# Altium PCB ZYNQ-HS-DEV-PCB.PcbDoc (part 10 of 13)
Units mm, origin at the board's own origin, x right, y up, seen from the top; angles counter-clockwise.
Board outline 125.73 x 111.93 mm, 10 copper layers (S1 (SIG), S2 (GND), S3 (SIG), S4 (GND), S5 (PWR), S6 (SIG), S7 (GND), S8 (SIG), S9 (GND), S10 (SIG)), stack 1.597 mm thick; 545 components, 400 nets, 2449 pads, 1577 vias.
Unrouted connection lines stored in the file: 309.
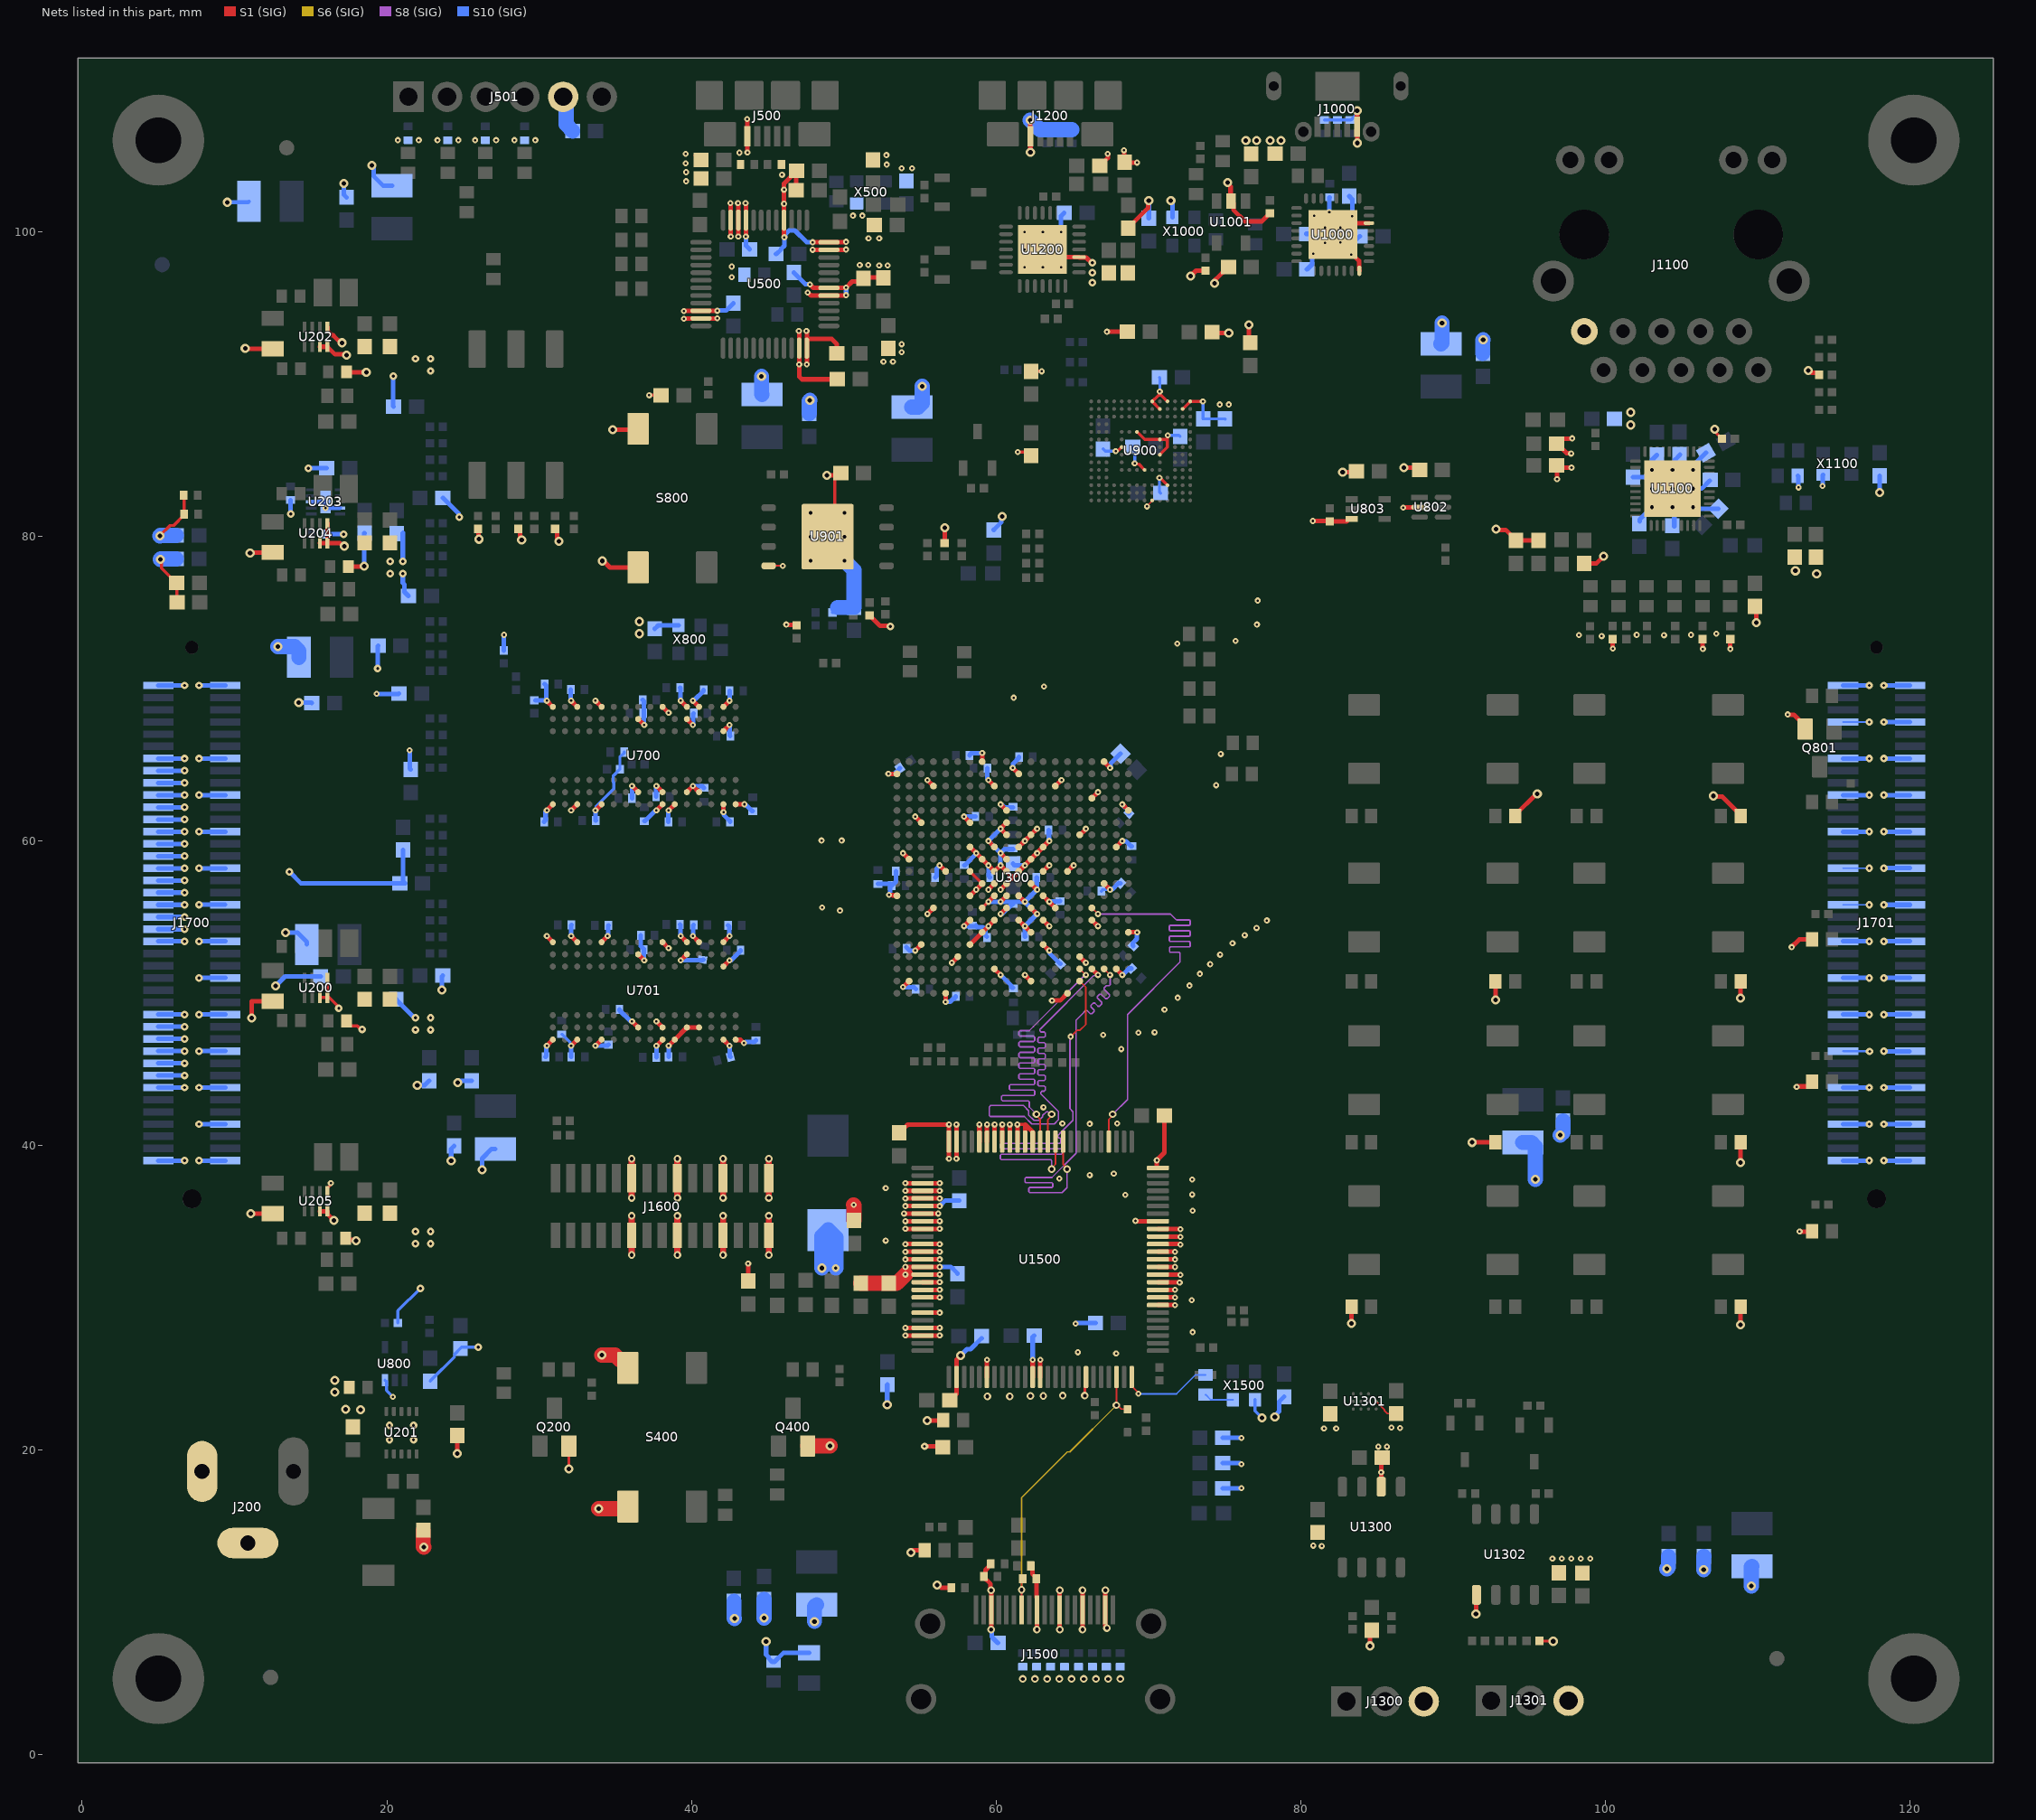
[diagram p17: the nets of this part, all layers, seen from the top]

## Via types
v1: diameter 0.4, hole 0.15, S1 (SIG) to S10 (SIG), tented both sides, 892 vias
v2: diameter 0.5, hole 0.2, S1 (SIG) to S10 (SIG), tented both sides, 231 vias
v3: diameter 0.6, hole 0.3, S1 (SIG) to S10 (SIG), tented both sides, 188 vias
v4: diameter 1, hole 0.5, S1 (SIG) to S10 (SIG), tented both sides, 158 vias
v5: diameter 0.5, hole 0.25, S1 (SIG) to S10 (SIG), tented both sides, 108 vias

## Nets (pads, with @x,y where several pads share a name; then routed paths per layer and width w, separated by ;. In a path a pad name is that pad's centre, name@x,y a point inside that pad or via, vN(x,y) a via of type N, cw(c..) or ccw(c..) an arc to the next point about the centre after c; other vN are vias at no path point) (continued)
GND: C201.1 C202.1 C203.1 C204.1 C205.1 C206.1 C208.1 C209.1 C210.1 C211.1 C212.1 C213.1 C214.1 C216.1 C217.1 C218.1 C220.1 C221.1 C222.1 C300.1 C301.1 C302.1 C303.2 C304.1 C305.1 C306.1 C307.1 C308.1 C309.1 C310.1 C311.1 C312.2 C313.1 C314.1 C315.2 C316.1 C317.1 C318.1 C319.1 C320.1 C321.1 C322.1 C323.2 C324.1 C325.1 C326.1 C327.1 C328.1 C329.1 C330.1 C331.2 C332.1 C333.1 C334.1 C335.1 C336.1 C337.1 C338.1 C339.1 C340.1 C341.1 C342.1 C343.1 C344.1 C345.1 C346.2 C347.1 C348.1 C349.2 C350.1 C351.1 C352.1 C353.1 C354.1 C355.1 C356.1 C357.1 C500.1 C501.1 C502.1 C503.1 C504.1 C505.1 C506.1 C507.1 C508.1 C509.1 C510.1 C511.1 C512.1 C513.1 C514.1 C515.1 C516.1 C600.1 C601.1 C602.1 C603.1 C604.1 C605.1 C606.1 C607.1 C608.1 C609.1 C610.1 C611.1 C612.1 C701.1 C702.1 C703.1 C704.1 C705.1 C707.1 C708.1 C709.1 C710.1 C711.1 C712.1 C713.1 C714.1 C715.1 C716.1 C717.1 C718.1 C719.1 C720.1 C721.1 C722.1 C723.1 C725.1 C726.1 C727.1 C728.1 C729.1 C731.1 C732.1 C733.1 C734.1 C735.1 C736.1 C737.1 C738.1 C739.1 C740.1 C741.1 C742.1 C743.1 C744.1 C745.1 C800.1 C801.1 C802.1 C803.2 C804.1 C805.1 C806.1 C900.1 C901.1 C902.1 C903.1 C904.1 C905.1 C906.1 C907.1 C908.1 C909.1 C910.1 C911.1 C912.1 C1000.1 C1001.1 C1002.1 C1003.1 C1004.1 C1005.1 C1006.1 C1007.1 C1008.1 C1100.1 C1101.1 C1102.1 C1103.1 C1104.1 C1105.1 C1106.1 C1107.1 C1108.1 C1109.1 C1110.1 C1111.1 C1112.1 C1113.1 C1114.1 C1115.1 C1116.1 C1117.1 C1200.1 C1201.1 C1202.1 C1203.1 C1204.1 C1205.1 C1300.1 C1301.1 C1302.1 C1303.1 C1304.1 C1305.1 C1306.1 C1500.1 C1501.1 C1502.1 C1503.1 C1504.1 C1505.1 C1506.1 C1507.1 C1508.1 C1509.1 C1510.1 C1511.1 C1512.1 C1513.1 C1514.1 C1515.1 C1516.1 C1517.1 C1520.1 D500.1 D501.1 D502.1 D503.1 D504.1 D505.1 D1000.1 D1001.1 D1002.1 D1200.1 D1201.1 D1202.1 D1400.2 D1401.2 D1402.2 D1501.1 D1502.1 D1503.1 D1504.1 D1505.1 D1506.1 D1507.1 D1508.1 D1509.1 D1510.1 D1511.1 D1512.1 D1513.1 J200.2 J200.3 J500.5 J501.5 J1000.5 J1100.10 J1200.5 J1300.3 J1301.3 J1500.2 J1500.5 J1500.8 J1500.11 J1500.17 J1600.1 J1600.1_1 J1600.4 J1600.4_1 J1600.7 J1600.7_1 J1600.10 J1600.10_1 J1700.1 J1700.2 J1700.13 J1700.14 J1700.15 J1700.17 J1700.19 J1700.20 J1700.21 J1700.23 J1700.25 J1700.26 J1700.27 J1700.29 J1700.31 J1700.32 J1700.33 J1700.35 J1700.37 J1700.38 J1700.39 J1700.41 J1700.43 J1700.44 J1700.50 J1700.55 J1700.56 J1700.57 J1700.59 J1700.61 J1700.62 J1700.63 J1700.65 J1700.67 J1700.68 J1700.74 J1700.79 J1700.80 J1701.1 J1701.2 J1701.7 J1701.8 J1701.13 J1701.14 J1701.19 J1701.20 J1701.25 J1701.26 J1701.31 J1701.32 J1701.37 J1701.38 J1701.43 J1701.44 J1701.49 J1701.50 J1701.55 J1701.56 J1701.61 J1701.62 J1701.67 J1701.68 J1701.73 J1701.74 J1701.79 J1701.80 Q200.2 Q400.2 Q801.2 R204.1 R205.1 R209.1 R215.1 R218.1 R300.2 R508.2 R626.1 R627.1 R700.1 R701.1 R802.1 R804.2 R807.1 R810.1 R823.2 R824.2 R916.1 R917.1 R918.1 R919.1 R920.1 R1005.1 R1006.1 R1110.1 R1111.1 R1112.1 R1117.2 R1120.1 R1123.1 R1308.1 R1405.2 R1406.2 R1412.2 R1413.2 R1414.2 R1415.2 R1505.1 R1509.1 S400.1 S400.2 S800.1 S800.2 U200.3 U200.4 U200.5 U201.11 U202.3 U202.4 U202.5 U203.4 U203.8 U203.11 U204.3 U204.4 U204.5 U205.3 U205.4 U205.5 U300.A8 U300.A18 U300.B1 U300.B11 U300.C4 U300.C9 U300.C14 U300.D17 U300.E10 U300.E20 U300.F3 U300.F7 U300.F10 U300.G10 U300.G12 U300.G16 U300.H7 U300.H9 U300.H11 U300.H13 U300.H19 U300.J2 U300.J8 U300.J10 U300.J12 U300.K5 U300.K7 U300.K9 U300.K10 U300.K11 U300.K13 U300.K15 U300.L8 U300.L9 U300.L10 U300.L12 U300.L18 U300.M1 U300.M7 U300.M9 U300.M10 U300.M11 U300.M13 U300.N4 U300.N8 U300.N10 U300.N12 U300.N14 U300.P7 U300.P9 U300.P11 U300.P13 U300.P17 U300.R8 U300.R12 U300.R20 U300.T3 U300.T7 U300.T13 U300.U6 U300.U16 U300.V9 U300.V19 U300.W2 U300.W12 U300.Y5 U300.Y15 U500.4 U500.9 U500.10 U500.11 U500.22 U500.23 U500.35 U500.36 U500.41 U500.42 U500.47 U500.48 U700.A9 U700.B1 U700.B3 U700.B9 U700.D1 U700.D8 U700.E1 U700.E2 U700.E8 U700.F9 U700.G1 U700.G8 U700.G9 U700.J2 U700.J8 U700.M1 U700.M9 U700.P1 U700.P9 U700.T1 U700.T9 U701.A9 U701.B1 U701.B3 U701.B9 U701.D1 U701.D8 U701.E1 U701.E2 U701.E8 U701.F9 U701.G1 U701.G8 U701.G9 U701.J2 U701.J8 U701.M1 U701.M9 U701.P1 U701.P9 U701.T1 U701.T9 U800.3 U802.2 U803.3 U900.A6 U900.C4 U900.E7 U900.G5 U900.H10 U900.J5 U900.K8 U900.N2 U900.N5 U900.P1 U900.P4 U900.P6 U901.4 U901.9 U1000.8 U1000.14 U1000.33 U1001.2 U1100.41 U1200.3 U1200.29 U1300.2 U1301.D2 U1302.5 U1500.3 U1500.4 U1500.5 U1500.6 U1500.7 U1500.8 U1500.9 U1500.11 U1500.12 U1500.13 U1500.14 U1500.15 U1500.16 U1500.17 U1500.18 U1500.20 U1500.22 U1500.23 U1500.27 U1500.31 U1500.37 U1500.38 U1500.44 U1500.57 U1500.58 U1500.59 U1500.60 U1500.61 U1500.62 U1500.63 U1500.64 U1500.65 U1500.66 U1500.67 U1500.68 U1500.75 U1500.89 U1500.90 U1500.91 U1500.92 U1500.93 U1500.94 U1500.95 U1500.96 U1500.99 U1500.100 X500.2 X800.2 X1000.2 X1100.2 X1500.2 | length 834
  S1 (SIG) w0.1: v1(69.9,81.95) 69.9,81.977 70.246,82.323 U900.A6@70.246,82.35
  S1 (SIG) w0.11: U901.4@45.067,78.058 v1@45.992,78.058 ; U1301.D2@84.95,23.2 85.5,22.65 85.5,22.575 85.675,22.4 C1301.1@86.275,22.4
  S1 (SIG) w0.2: v3(5.1,80.025) 5.778,80.703 6.003,80.703 6.7,81.4 C720.1@6.7,81.45 6.687,81.462 6.687,82.688 C707.1@6.675,82.7 ; v3(5.125,78.475) 5.202,78.398 5.202,77.898 6.175,76.925 C736.1@6.2,76.925 6.225,76.9 C719.1@6.225,75.65 ; U200.3@15.6,49.71 U200.4@16.1,49.71 ; U205.5@16.1,36.975 16.1,37.2 16.287,37.387 16.287,37.487 v1(16.325,37.525) ; U200.5@16.1,51 U200.4@16.1,49.71 ; v2(16.85,49) 16.85,49.081 16.509,49.422 16.509,49.426 16.225,49.71 U200.4@16.1,49.71 ; R204.1@17.35,48.175 17.35,48.1 17.6,47.85 18.069,47.85 18.294,47.625 v2(18.375,47.625) ; v3(31.95,18.775) Q200.2@31.95,20.275 ; v1(37.225,89.25) C801.1@38,89.25 ; U901.9@48.937,79.963 49.4,80.426 49.4,83.775 49.625,84 49.775,84.15 C912.1@49.8,84.15 ; U300.K7@58.288,57.995 U300.L8@59.088,57.195 ; U300.N8@59.088,55.595 v1(59.488,55.995) ; v1(61.4,41.375) 61.919,41.375 61.919,41.306 ; v1(61.425,85.525) 62.067,85.525 C903.1@62.308,85.285 ; C904.1@62.3,90.825 v1(63,90.825) ; v5(65.825,23.575) 65.825,24.058 65.85,24.083 65.85,24.75 U1500.44@65.9,24.8 ; v1(67.846,85.575) 67.885,85.614 67.996,85.614 68.233,85.85 U900.H10@68.246,85.85 ; v1(69.096,84.775) 69.135,84.737 69.36,84.737 U900.E7@69.746,84.35 ; U900.K8@69.246,86.85 69.746,86.35 U900.J5@70.746,86.35 71.133,86.35 71.25,86.233 ; v1(70.721,83.825) 70.758,83.825 71.233,83.35 U900.C4@71.246,83.35 ; U900.G5@70.746,85.35 71.25,85.854 71.25,86.233 ; U900.N5@70.746,88.35 U900.P6@70.246,88.85 70.664,89.267 ; v1(70.75,89.5) 70.712,89.462 70.712,89.316 70.664,89.267 ; U900.P4@71.246,88.85 70.829,89.267 70.664,89.267 ; v1(71.275,86.625) 71.25,86.6 71.25,86.233 ; U900.N2@72.246,88.35 U900.P1@72.746,88.85 73.125,88.85 v1(73.575,88.85) ; R1308.1@95.675,7.475 95.687,7.462 96.563,7.462 v3(96.575,7.45) ; v3(107.175,87.025) 107.252,86.948 107.252,86.798 R1123.1@107.65,86.4
  S1 (SIG) w0.3: v3(10.7,92.325) 10.7,92.3 C210.1@12.514,92.3 ; v3(11.025,78.9) 11.025,78.936 C218.1@12.514,78.936 ; v3(11.075,35.525) C222.1@12.514,35.525 ; v3(11.125,48.375) 11.125,49.475 C203.1@12.514,49.475 ; U205.3@15.6,35.685 U205.4@16.1,35.685 16.1,35.51 16.525,35.085 v3(16.525,35.075) ; U204.3@15.6,79.546 15.602,79.548 U204.4@16.1,79.546 ; U202.3@15.6,92.435 U202.4@16.1,92.435 16.603,91.932 17.293,91.932 v3(17.35,91.875) ; U204.4@16.1,79.546 U204.4@16.1,79.546 ; U204.5@16.1,80.836 U204.4@16.1,79.546 ; U202.5@16.1,93.725 16.1,93.5 16.418,93.182 16.487,93.182 16.969,92.7 v3(17.05,92.7) ; v3(17.2,79.35) 17.119,79.35 16.921,79.548 U204.4@16.1,79.546 ; R218.1@17.3,33.9 17.393,33.807 17.918,33.807 v3(17.975,33.75) ; R209.1@17.35,90.788 17.369,90.769 18.631,90.769 v3(18.65,90.75) ; R215.1@17.475,78 17.488,78.013 18.513,78.013 v3(18.525,78.025) ; C205.1@24.613,20.95 24.625,20.938 v3(24.625,19.775) ; R918.1@25.993,80.479 26.021,80.45 26.021,79.829 v3(26.05,79.8) ; R919.1@28.634,80.479 28.759,80.354 28.759,79.922 28.85,79.831 v3(28.85,79.75) ; v1(30.5,46.55) U701.T9@30.9,46.95 ; v1(30.5,53.75) U701.T1@30.9,53.35 ; v1(30.5,62) U700.T9@30.9,62.4 ; v1(30.5,69.2) U700.T1@30.9,68.8 ; R920.1@31.054,80.479 31.179,80.354 31.179,79.877 31.3,79.756 v3(31.3,79.675) ; v1(32.1,46.55) U701.P9@32.5,46.95 ; v1(32.1,53.75) U701.P1@32.5,53.35 ; v1(32.1,62) U700.P9@32.5,62.4 ; v1(32.1,69.2) U700.P1@32.5,68.8 ; v1(33.7,46.55) U701.M9@34.1,46.95 ; v1(33.7,62) U700.M9@34.1,62.4 ; v1(33.7,69.2) U700.M1@34.1,68.8 ; U701.M1@34.1,53.35 v1(34.5,53.75) ; v3(34.15,78.375) 34.231,78.375 34.656,77.95 S800.2@36.5,77.95 ; v3(34.825,87) 36.45,87 S800.1@36.5,87.05 ; v1(36.1,48.15) U701.J8@36.5,47.75 ; v1(36.1,63.6) U700.J8@36.5,63.2 ; U701.J2@36.5,52.55 v1(36.9,52.15) ; U700.J2@36.5,68 v1(36.9,67.6) ; v1(37.7,46.55) U701.G9@38.1,46.95 ; v1(37.7,48.15) U701.G8@38.1,47.75 ; v1(37.7,62) U700.G9@38.1,62.4 ; v1(37.7,63.6) U700.G8@38.1,63.2 ; U701.G1@38.1,53.35 v1(38.5,52.95) ; U700.G1@38.1,68.8 v1(38.5,68.4) ; v1(38.5,46.55) U701.F9@38.9,46.95 U701.E8@39.7,47.75 U701.D8@40.5,47.75 ; v1(38.5,62) U700.F9@38.9,62.4 ; v1(39.3,52.15) U701.E2@39.7,52.55 ; v1(39.3,53.75) U701.E1@39.7,53.35 ; v1(39.3,69.2) U700.E1@39.7,68.8 ; v1(39.5,94.275) 39.527,94.275 39.552,94.3 U500.23@40.625,94.3 v1(41.698,94.3) ; v1(39.5,94.775) 39.527,94.775 39.552,94.8 U500.22@40.625,94.8 v1(41.698,94.8) ; U700.E8@39.7,63.2 v1(40.1,63.6) U700.D8@40.5,63.2 ; U700.E2@39.7,68 v1(40.1,67.6) ; v1(40.1,53.75) U701.D1@40.5,53.35 ; v1(40.1,69.2) U700.D1@40.5,68.8 ; C503.1@40.3,105 C503.1@40.625,104.675 ; C502.1@40.6,103.6 C502.1@40.625,103.575 ; U701.B9@42.1,46.95 v1(42.5,46.55) ; U701.B3@42.1,51.75 v1(42.5,52.15) ; U701.B1@42.1,53.35 v1(42.5,53.75) ; v1(42.1,61.875) U700.B9@42.1,62.4 ; U700.B3@42.1,67.2 v1(42.5,67.6) ; U700.B1@42.1,68.8 v1(42.5,69.2) ; v1(42.55,101.875) 42.55,101.848 42.575,101.823 U500.11@42.575,100.75 v1(42.575,99.677) ; U701.A9@42.9,46.95 42.919,46.931 43.217,46.931 43.423,46.725 v1(43.45,46.725) ; U700.A9@42.9,62.4 v1(43.475,62.4) ; v1(43.05,101.875) 43.05,101.848 43.075,101.823 U500.10@43.075,100.75 v1(43.075,99.677) ; v1(43.55,101.875) 43.55,101.848 43.575,101.823 U500.9@43.575,100.75 v1(43.575,99.677) ; v1(43.65,107.387) 43.65,107.36 43.675,107.335 J500.5@43.675,106.262 v1(43.675,105.19) ; v1(43.725,32.25) C1507.1@43.725,31.101 ; v1(46.1,99.625) 46.1,99.652 46.075,99.677 U500.4@46.075,100.75 v1(46.075,101.823) v1(46.075,102.745) 46.075,103.15 46.55,103.625 46.55,103.65 46.875,103.975 C504.1@46.9,103.975 46.875,103.95 C505.1@46.875,102.7 ; v1(46.225,74.2) 46.244,74.181 46.869,74.181 R807.1@46.9,74.15 ; v1(47.05,93.475) 47.05,93.448 47.075,93.423 U500.35@47.075,92.35 v1(47.075,91.277) 47.075,90.476 47.251,90.3 C513.1@49.575,90.3 C513.1@49.72,90.3 ; v1(47.55,93.475) 47.55,93.448 47.575,93.423 U500.36@47.575,92.9 ; v1(47.575,91.277) U500.36@47.575,92.35 U500.36@47.575,92.9 ; v1(47.625,96) 47.652,96 47.852,95.8 50.098,95.8 50.123,95.825 v1(50.15,95.825) ; v1(47.775,96.525) 48,96.3 50.098,96.3 50.123,96.325 v1(50.15,96.325) 50.551,96.726 51.026,96.726 51.3,97 52.55,97 C501.1@52.6,96.95 ; v1(47.952,98.8) U500.47@49.025,98.8 50.098,98.8 50.123,98.825 v1(50.15,98.825) ; v1(47.952,99.3) U500.48@49.025,99.3 50.098,99.3 50.123,99.325 v1(50.15,99.325) ; v3(48.9,84) 49.625,84 49.65,84 C912.1@49.8,84.15 ; C514.1@49.55,92 49.55,92.6 49.2,92.95 47.625,92.95 U500.36@47.575,92.9 ; R916.1@51.7,74.8 52.381,74.119 53.017,74.119 v2(53.055,74.08) ; v1(52.925,64.4) 52.93,64.395 U300.B1@53.488,64.395 ; v1(52.967,56.449) 52.986,56.43 53.228,56.43 53.234,56.423 53.459,56.423 U300.M1@53.488,56.395 ; C1516.1@53.65,40.825 53.65,40.85 53.975,41.175 54,41.175 54.2,41.375 v1(56.9,41.375) U1500.100@56.9,40.25 v1(56.9,39.125) ; v1(53.888,50.395) U300.W2@54.288,50.795 ; v1(53.888,59.195) U300.J2@54.288,58.795 ; v1(53.959,35.528) v1(56.209,35.528) ; v1(54.05,27.525) U1500.23@55.175,27.525 v1(56.3,27.525) ; v1(54.05,28.025) U1500.22@55.175,28.025 v1(56.3,28.025) ; v1(54.05,31.525) U1500.15@55.175,31.525 v1(56.3,31.525) ; v1(54.05,32.025) U1500.14@55.175,32.025 v1(56.3,32.025) ; v1(54.05,32.525) U1500.13@55.175,32.525 v1(56.3,32.525) ; v1(54.05,33.025) U1500.12@55.175,33.025 v1(56.3,33.025) ; v1(54.05,33.525) U1500.11@55.175,33.525 v1(56.3,33.525) ; v1(54.05,34.525) U1500.9@55.175,34.525 v1(56.3,34.525) ; v1(54.05,35.025) U1500.8@55.175,35.025 v1(56.3,35.025) ; v1(54.05,36.025) U1500.6@55.175,36.025 v1(56.3,36.025) ; v1(54.05,36.525) U1500.5@55.175,36.525 v1(56.3,36.525) ; v1(54.05,37.025) U1500.4@55.175,37.025 v1(56.3,37.025) ; v1(54.05,37.525) U1500.3@55.175,37.525 v1(56.3,37.525) ; v3(54.4,13.275) 54.55,13.425 R1505.1@55.325,13.425 ; v1(54.688,52.795) U300.T3@55.088,53.195 ; v1(54.688,61.595) U300.F3@55.088,61.195 ; U1500.20@55.175,29.025 v1(56.3,29.025) ; U1500.18@55.175,30.025 v1(56.3,30.025) ; U1500.17@55.175,30.525 v1(56.3,30.525) ; U1500.16@55.175,31.025 v1(56.3,31.025) ; v2(55.3,20.25) 56.45,20.25 C1506.1@56.5,20.2 ; v3(55.475,21.95) 56.5,21.95 R1509.1@56.525,21.975 ; v1(55.488,55.195) U300.N4@55.888,55.595 ; v1(55.488,63.995) U300.C4@55.888,63.595 ; v3(56.125,11.15) 56.206,11.15 56.381,10.975 D1506.1@57.05,10.975 ; v1(56.288,58.395) U300.K5@56.688,57.995 ; R917.1@56.619,79.547 56.622,79.55 56.622,80.547 v3(56.625,80.55) ; v1(56.688,49.42) U300.Y5@56.688,49.995 ; C1510.1@56.95,23.275 56.975,23.275 57.4,23.7 U1500.27@57.4,24.8 57.4,25.936 v3(57.675,26.211) ; v1(57.088,51.995) U300.U6@57.488,52.395 ; v1(57.4,39.125) U1500.99@57.4,40.25 v1(57.4,41.375) ; v1(57.888,54.395) U300.P7@58.288,54.795 ; v1(57.888,61.595) U300.F7@58.288,61.195 ; U300.T7@58.288,53.195 v1(59.488,54.395) U300.P9@59.888,54.795 ; U300.M7@58.288,56.395 v1(58.688,56.795) U300.L8@59.088,57.195 ; U300.H7@58.288,59.595 v1(58.688,59.195) U300.J8@59.088,58.795 v1(59.488,58.395) U300.K9@59.888,57.995 v1(60.288,58.395) U300.K10@60.688,57.995 61.088,57.595 ; U1500.96@58.9,40.25 v1(58.9,41.375) ; U300.A8@59.088,65.195 v1(59.088,65.76) ; U1500.31@59.4,24.8 v1(59.4,25.925) ; U1500.95@59.4,40.25 v1(59.4,41.375) ; v1(59.488,55.995) U300.M9@59.888,56.395 ; v1(59.488,56.795) U300.L9@59.888,57.195 ; v1(59.488,59.995) U300.H9@59.888,59.595 ; v1(59.488,63.995) U300.C9@59.888,63.595 ; D1504.1@59.65,12.525 59.65,12.475 59.3,12.125 59.3,11.8 D1507.1@59.2,11.7 59.2,11.65 59.637,11.213 59.637,10.834 v5(59.675,10.795) J1500.17@59.675,9.513 v5(59.675,8.222) ; U300.V9@59.888,51.595 v1(60.288,51.195) ; U1500.94@59.9,40.25 v1(59.9,41.375) ; v1(60.288,55.195) U300.N10@60.688,55.595 ; v1(60.288,55.995) U300.M10@60.688,56.395 ; v1(60.288,56.795) U300.L10@60.688,57.195 61.088,57.595 ; v1(60.288,59.195) U300.J10@60.688,58.795 ; v1(60.288,62.395) U300.E10@60.688,61.995 ; U1500.93@60.4,40.25 v1(60.4,41.375) ; U300.G10@60.688,60.395 v1(60.288,60.795) U300.F10@60.688,61.195 ; U1500.92@60.9,40.25 v1(60.9,41.375) ; v1(61.088,64.795) U300.B11@61.488,64.395 ; U1500.91@61.4,40.25 v1(61.4,41.375) ; U300.P11@61.488,54.795 v1(61.888,54.395) U300.R12@62.288,53.995 ; U300.M11@61.488,56.395 v1(61.888,55.995) ; U300.H11@61.488,59.595 v1(61.888,59.995) U300.G12@62.288,60.395 v1(62.688,60.795) ; v1(61.888,51.195) U300.W12@62.288,50.795 ; U1500.90@61.9,40.25 61.9,41.306 ; 61.919,41.375 62.4,40.894 U1500.89@62.4,40.25 ; v3@62.25,107.32 J1200.5@62.25,106.262 62.252,106.261 62.252,105.203 v3(62.253,105.202) ; D1503.1@62.275,12.4 62.375,12.3 62.375,11.875 62.65,11.6 D1501.1@62.65,11.55 62.65,10.338 62.675,10.313 J1500.11@62.675,9.513 v5(62.675,8.222) ; U300.N12@62.288,55.595 v1(62.688,55.195) ; U300.L12@62.288,57.195 v1(62.688,56.795) ; U1500.37@62.4,24.8 v1(62.4,25.925) ; U1500.38@62.9,24.8 v1(62.9,25.925) ; U300.T13@63.088,53.195 v1(63.488,52.795) ; U300.P13@63.088,54.795 v1(63.488,54.395) ; U300.M13@63.088,56.395 v1(63.488,55.995) U300.N14@63.888,55.595 ; U300.K13@63.088,57.995 v1(63.488,58.395) ; v1(63.488,59.995) v1(62.688,59.195) v1(61.888,58.395) 61.088,57.595 ; v1(63.666,49.519) 64.208,49.52 64.683,49.995 U300.Y15@64.688,49.995 ; U300.C14@63.888,63.595 v1(64.288,63.995) ; v5(64.175,8.222) J1500.8@64.175,9.513 v5(64.175,10.795) ; v1(64.261,98.812) 64.261,98.564 64.5,98.325 U1200.3@65.45,98.325 65.475,98.3 65.921,98.3 66.271,97.95 v2(66.325,97.95) ; U300.K15@64.688,57.995 v1(65.088,58.395) ; U300.U16@65.488,52.395 v1(65.888,51.995) ; U300.G16@65.492,60.361 v1@65.892,60.761 ; v5(65.675,8.222) J1500.5@65.675,9.513 v5(65.675,10.795) ; U300.P17@66.288,54.795 v1(66.688,54.395) ; U300.D17@66.288,62.795 v1(66.688,63.195) ; C1204.1@66.8,104.325 66.825,104.325 67.331,104.831 v1(67.331,105.106) ; U300.L18@67.088,57.195 v1(67.488,56.795) ; U300.A18@67.088,65.195 v1(67.488,64.795) ; v5(67.175,10.795) 67.175,8.472 67.275,8.372 v5(67.275,8.318) ; v1(67.275,93.425) 67.285,93.435 C906.1@68.613,93.435 ; U300.V19@67.888,51.595 v1(68.288,51.195) ; U300.H19@67.888,59.595 v1(68.288,59.995) ; v1(68.288,62.395) U300.E20@68.688,61.995 ; v1(68.4,105.325) 68.4,104.575 C1205.1@68.425,104.55 68.45,104.525 v1(69.25,104.525) ; C1200.1@68.675,100.225 68.798,100.225 68.805,100.218 68.805,100.38 69.968,101.543 69.968,101.968 v3(70.025,102.025) ; U300.R20@68.688,53.995 v1(69.263,53.995) ; v1(69.15,35.05) 69.177,35.05 69.202,35.025 U1500.68@70.625,35.025 ; U1500.57@70.625,29.525 v1(71.75,29.525) ; U1500.58@70.625,30.025 v1(71.75,30.025) ; U1500.59@70.625,30.525 v1(71.75,30.525) ; U1500.60@70.625,31.025 71.998,31.025 72.023,31 v1(72.05,31) ; U1500.61@70.625,31.525 72.048,31.525 72.073,31.5 v1(72.1,31.5) ; U1500.62@70.625,32.025 v1(71.75,32.025) ; U1500.63@70.625,32.525 v1(71.75,32.525) ; U1500.64@70.625,33.025 v1(71.75,33.025) ; U1500.65@70.625,33.525 72.048,33.525 72.073,33.5 v1(72.1,33.5) ; U1500.66@70.625,34.025 72.048,34.025 72.073,34 v1(72.1,34) ; U1500.67@70.625,34.525 72.048,34.525 72.073,34.5 v1(72.1,34.5) ; U1500.75@70.625,38.525 70.55,38.525 v1(70.55,39.025) 71.05,39.525 C1517.1@71.05,41.975 ; v3(72.775,97.075) 73.127,97.427 R1006.1@73.749,97.427 ; C908.1@74.175,93.4 74.225,93.35 v3(75.275,93.35) ; v3(74.35,96.6) 74.407,96.657 74.407,96.857 75.225,97.675 C1007.1@75.25,97.675 ; v3(75.2,103.225) 75.2,103.144 75.394,102.95 75.394,102.031 U1001.2@75.425,102 75.575,101.85 75.575,101.425 76.325,100.675 77.45,100.675 R1005.1@77.794,101.019 ; v3(76.6,93.875) 76.6,92.775 C909.1@76.675,92.7 ; v1(80.8,81) 80.813,80.987 81.887,80.987 R810.1@81.9,80.975 82.999,80.975 83.15,81.126 U803.3@83.35,81.126 ; U1000.33@82.1,99.8 82.85,100.55 U1000.14@84.475,100.55 ; v3(82.75,84.2) 83.599,84.2 C804.1@83.65,84.251 ; v3(83.333,28.317) R1405.2@83.333,29.408 ; U1000.33@83.401,98.499 83.825,98.075 83.825,97.45 U1000.8@83.85,97.425 ; v3@83.7,107.933 J1000.5@83.7,106.875 83.702,106.873 83.702,105.816 v3(83.703,105.814) ; v3(84.55,7.15) 84.55,8.05 C1304.1@84.675,8.175 ; U1300.2@85.28,17.6 v1(85.28,18.55) 85.28,19.5 C1300.1@85.35,19.5 ; v1(86.725,81.875) 86.741,81.891 87.79,81.891 U802.2@87.8,81.901 ; v3(86.775,84.5) 87.651,84.5 C805.1@87.8,84.351 ; v3(91.25,40.2) R1414.2@92.783,40.2 ; v3(91.5,9.25) 91.518,9.267 91.518,10.482 U1302.5@91.535,10.5 ; v3(92.783,49.567) R1413.2@92.783,50.775 ; v3(92.825,80.475) 92.882,80.418 93.452,80.418 94.125,79.744 C1111.1@94.125,79.719 C1110.1@95.617,79.719 ; R823.2@94.083,61.625 94.083,61.7 95.458,63.075 v3(95.533,63.075) ; C1106.1@96.8,84.655 C1106.1@96.825,84.63 ; C1105.1@96.8,86.08 97.125,86.405 97.778,86.405 97.798,86.425 v1(97.825,86.425) ; v1(96.825,83.75) C1106.1@96.825,84.63 ; C1105.1@96.825,86.08 97.461,85.444 97.731,85.444 v1(97.75,85.425) ; v1(97.775,84.5) 96.955,84.5 C1106.1@96.825,84.63 ; C1112.1@98.6,78.219 99.419,78.219 v3(99.875,78.675) ; R1112.1@100.475,73.25 100.483,73.242 100.483,72.63 v1(100.49,72.623) ; R1111.1@106.375,73.25 106.388,73.237 106.388,72.612 v1(106.4,72.6) ; v3(107.1,62.95) 107.157,62.893 107.679,62.893 108.872,61.7 R824.2@108.872,61.625 ; v1(108.2,72.6) R1110.1@108.2,73.25 ; v3(108.872,28.222) R1406.2@108.872,29.408 ; v3(108.872,38.878) R1415.2@108.872,40.2 ; v3(108.872,49.672) R1412.2@108.872,50.775 ; C1101.1@109.825,75.4 109.9,75.325 v3(109.9,74.325) ; v1(111.975,68.3) 111.994,68.281 112.369,68.281 113.115,67.535 Q801.2@113.115,67.335 ; v1(112.225,53.025) 112.721,53.521 D1401.2@113.565,53.521 ; v1(112.55,43.85) 112.577,43.85 112.602,43.875 113.315,43.875 113.565,44.125 D1402.2@113.565,44.2 ; v1(112.75,34.35) 113.546,34.35 D1400.2@113.565,34.368 ; v3(113.325,90.875) 113.406,90.875 113.556,90.725 113.9,90.725 R1120.1@114.025,90.6 ; C1507.1@43.725,31.101 C1507.1@43.726,31.1
  S1 (SIG) w0.4: v5(36.075,32.809) J1600.10_1@36.075,34.1 v5(36.075,35.383) ; v5(36.075,36.559) J1600.10@36.075,37.85 v5(36.075,39.133) ; v5(39.075,32.809) J1600.7_1@39.075,34.1 v5(39.075,35.383) ; v5(39.075,36.559) J1600.7@39.075,37.85 v5(39.075,39.133) ; v5(42.075,32.809) J1600.4_1@42.075,34.1 v5(42.075,35.383) ; v5(42.075,36.559) J1600.4@42.075,37.85 v5(42.075,39.133) ; v5(45.075,32.809) J1600.1_1@45.075,34.1 v5(45.075,35.383) ; v5(45.075,36.559) J1600.1@45.075,37.85 v5(45.075,39.133)
  S1 (SIG) w1: C204.1@22.388,14.75 22.388,13.662 v3(22.425,13.625) ; v3(33.9,16.15) 35.675,16.15 S400.2@35.825,16.3 ; v3(34.125,26.25) 34.975,26.25 35.275,25.95 35.625,25.95 35.825,25.75 S400.1@35.825,25.4 ; Q400.2@47.625,20.275 v3(49.1,20.275) ; v1(50.65,36.1) 50.675,36.075 C1512.1@50.675,35.075 ; C1508.1@51.1,30.95 C1509.1@52.95,30.95 53.475,30.95 v1(54.05,31.525)
  S10 (SIG) w0.11: J1700.79@5,39 v2(6.725,39) ; J1700.67@5,43.8 v2(6.725,43.8) ; J1700.65@5,44.6 v2(6.725,44.6) ; J1700.63@5,45.4 v2(6.725,45.4) ; J1700.61@5,46.2 v2(6.725,46.2) ; J1700.59@5,47 v2(6.725,47) ; J1700.57@5,47.8 v2(6.725,47.8) ; J1700.55@5,48.6 v2(6.725,48.6) ; J1700.43@5,53.4 v2(6.725,53.4) ; J1700.41@5,54.2 v2(6.725,54.2) ; J1700.39@5,55 v2(6.725,55) ; J1700.37@5,55.8 v2(6.725,55.8) ; J1700.35@5,56.6 v2(6.725,56.6) ; J1700.33@5,57.4 v2(6.725,57.4) ; J1700.31@5,58.2 v2(6.725,58.2) ; J1700.29@5,59 v2(6.725,59) ; J1700.27@5,59.8 v2(6.725,59.8) ; J1700.25@5,60.6 v2(6.725,60.6) ; J1700.23@5,61.4 v2(6.725,61.4) ; J1700.21@5,62.2 v2(6.725,62.2) ; J1700.19@5,63 v2(6.725,63) ; J1700.17@5,63.8 v2(6.725,63.8) ; J1700.15@5,64.6 v2(6.725,64.6) ; J1700.13@5,65.4 v2(6.725,65.4) ; J1700.1@5,70.2 v2(6.725,70.2) ; v2(7.664,55.813) J1700.38@9.389,55.813 ; v2(7.675,39) J1700.80@9.4,39 ; v2(7.675,41.4) J1700.74@9.4,41.4 ; v2(7.675,43.8) J1700.68@9.4,43.8 ; v2(7.675,46.2) J1700.62@9.4,46.2 ; v2(7.675,48.6) J1700.56@9.4,48.6 ; v2(7.675,51) J1700.50@9.4,51 ; v2(7.675,53.4) J1700.44@9.4,53.4 ; v2(7.675,58.2) J1700.32@9.4,58.2 ; v2(7.675,60.6) J1700.26@9.4,60.6 ; v2(7.675,63) J1700.20@9.4,63 ; v2(7.675,65.4) J1700.14@9.4,65.4 ; v2(7.675,70.2) J1700.2@9.4,70.2 ; J1701.79@115.6,39 v2(117.325,39) ; J1701.73@115.6,41.4 v2(117.325,41.4) ; J1701.67@115.6,43.8 v2(117.325,43.8) ; J1701.55@115.6,48.6 v2(117.325,48.6) ; J1701.49@115.6,51 v2(117.325,51) ; J1701.43@115.6,53.4 v2(117.325,53.4) ; J1701.37@115.6,55.8 v2(117.325,55.8) ; J1701.31@115.6,58.2 v2(117.325,58.2) ; J1701.25@115.6,60.6 v2(117.325,60.6) ; J1701.19@115.6,63 v2(117.325,63) ; J1701.13@115.6,65.4 v2(117.325,65.4) ; J1701.7@115.6,67.8 v2(117.325,67.8) ; J1701.1@115.6,70.2 v2(117.325,70.2) ; v2@117.325,46.2 J1701.61@115.6,46.2 115.625,46.175 v2(117.35,46.175) ; v2@118.25,46.175 119.975,46.175 J1701.62@120,46.2 v2(118.275,46.2) ; v2(118.275,41.4) J1701.74@120,41.4 ; v2(118.275,43.8) J1701.68@120,43.8 ; v2(118.275,48.6) J1701.56@120,48.6 ; v2(118.275,51) J1701.50@120,51 ; v2(118.275,53.4) J1701.44@120,53.4 ; v2(118.275,55.8) J1701.38@120,55.8 ; v2(118.275,58.2) J1701.32@120,58.2 ; v2(118.275,60.6) J1701.26@120,60.6 ; v2(118.275,63) J1701.20@120,63 ; v2(118.275,65.4) J1701.14@120,65.4 ; v2(118.275,67.8) J1701.8@120,67.8 ; v2(118.275,70.2) J1701.2@120,70.2
  S10 (SIG) w0.2: U800.3@19.875,24.6 19.975,24.5 19.975,23.925 v1(20.4,23.5) ; R802.1@20.725,28.35 20.725,29.15 v2(22.2,30.625) ; C800.1@22.85,24.525 22.85,24.55 24.45,26.15 24.45,26.3 C802.1@24.825,26.675 24.9,26.75 v2(26,26.75) ; C712.1@31.475,47.3 31.525,47.3 32.062,46.763 32.062,46.588 v1(32.1,46.55) ; v1(33.7,62) 33.738,62.038 33.738,62.273 34.9,63.434 34.9,63.825 34.858,63.867 34.858,64.258 R700.1@35.3,64.7 35.3,65.5 35.575,65.775 C713.1@35.575,65.825 ; R804.2@49.26,74.998 49.585,74.998 49.585,75.323 ; C330.1@66.9,56.7 66.995,56.795 v1(67.488,56.795) ; C902.1@67.025,85.725 67.175,85.575 v1(67.846,85.575) ; C901.1@68.971,85.875 69.096,85.75 v1(69.096,84.775) ; v1(70.721,83.825) 70.721,82.904 C905.1@70.8,82.825 ; C907.1@70.725,90.425 70.75,90.4 v1(70.75,89.5) ; v1(71.275,86.625) 72,86.625 C900.1@72.075,86.55 ; v1(73.575,88.85) 73.575,87.725 C910.1@73.6,87.7 75.033,87.7 C911.1@75.036,87.697 ; X1500.2@77,23.31 77,22.575 v3(77.45,22.125) ; D1000.1@81.55,107.332 81.554,107.329 83.246,107.329 D1002.1@83.25,107.325 83.3,107.325 83.622,107.647 83.622,107.858 v3(83.698,107.934)
  S10 (SIG) w0.254: v3(9.525,101.925) 10.9,101.925 C302.1@10.95,101.975
  S10 (SIG) w0.3: J1700.79@5,39 v2(6.725,39) ; J1700.67@5,43.8 v2(6.725,43.8) ; J1700.65@5,44.6 v2(6.725,44.6) ; J1700.63@5,45.4 v2(6.725,45.4) ; J1700.61@5,46.2 v2(6.725,46.2) ; J1700.59@5,47 v2(6.725,47) ; J1700.57@5,47.8 v2(6.725,47.8) ; J1700.55@5,48.6 v2(6.725,48.6) ; J1700.43@5,53.4 v2(6.725,53.4) ; J1700.41@5,54.2 v2(6.725,54.2) ; J1700.39@5,55 v2(6.725,55) ; J1700.37@5,55.8 v2(6.725,55.8) ; J1700.35@5,56.6 v2(6.725,56.6) ; J1700.33@5,57.4 v2(6.725,57.4) ; J1700.31@5,58.2 v2(6.725,58.2) ; J1700.29@5,59 v2(6.725,59) ; J1700.27@5,59.8 v2(6.725,59.8) ; J1700.25@5,60.6 v2(6.725,60.6) ; J1700.23@5,61.4 v2(6.725,61.4) ; J1700.21@5,62.2 v2(6.725,62.2) ; J1700.19@5,63 v2(6.725,63) ; J1700.17@5,63.8 v2(6.725,63.8) ; J1700.15@5,64.6 v2(6.725,64.6) ; J1700.13@5,65.4 v2(6.725,65.4) ; J1700.1@5,70.2 v2(6.725,70.2) ; v2(7.664,55.813) J1700.38@9.389,55.813 ; v2(7.675,39) J1700.80@9.4,39 ; v2(7.675,41.4) J1700.74@9.4,41.4 ; v2(7.675,43.8) J1700.68@9.4,43.8 ; v2(7.675,46.2) J1700.62@9.4,46.2 ; v2(7.675,48.6) J1700.56@9.4,48.6 ; v2(7.675,51) J1700.50@9.4,51 ; v2(7.675,53.4) J1700.44@9.4,53.4 ; v2(7.675,58.2) J1700.32@9.4,58.2 ; v2(7.675,60.6) J1700.26@9.4,60.6 ; v2(7.675,63) J1700.20@9.4,63 ; v2(7.675,65.4) J1700.14@9.4,65.4 ; v2(7.675,70.2) J1700.2@9.4,70.2 ; v3(12.7,50.475) 13.325,51.1 C322.1@15.65,51.1 ; v3(13.35,53.986) 14.125,53.986 14.75,53.361 C323.2@14.75,53.2 ; v2(13.6,57.975) 14.375,57.2 21.2,57.2 21.075,57.325 C606.1@21.075,59.396 ; C211.1@13.685,82.375 13.685,81.45 v2(13.7,81.45) ; v3(14.225,69.075) 15.05,69.075 C345.1@15.075,69.05 ; v2(14.85,84.45) 14.85,84.475 C214.1@16.06,84.475 ; U203.8@15.035,82.25 U203.11@15.98,82.25 v1(15.98,81.85) U203.4@16.925,81.85 ; C213.1@15.96,80.15 17.175,80.15 v2(17.175,80.125) ; v3(17.175,103.15) 17.175,102.424 C332.1@17.349,102.25 ; v3(18.525,78.025) 18.525,80.2 C212.1@18.55,80.2 ; v3(19.025,104.35) 19.149,104.226 19.149,103.625 19.774,103 C331.2@20.349,103 ; v1(19.325,69.65) 20.775,69.65 C609.1@20.8,69.675 ; v2(19.4,71.325) 19.4,72.775 C605.1@19.425,72.8 ; v2(20.425,90.5) 20.425,88.525 C602.1@20.45,88.5 ; C603.1@20.625,49.6 20.625,49.575 21.767,48.433 21.837,48.433 v2(21.875,48.395) ; v2(21.05,77.55) 21.05,76.925 21.157,76.818 21.157,76.343 C608.1@21.425,76.075 ; v2(21.05,78.35) 21.05,80.2 C604.1@21.075,80.225 ; v1(21.5,65.95) 21.5,64.75 C610.1@21.575,64.675 ; v3(22,43.95) 22.475,43.95 C304.1@22.775,44.25 ; v3(23.625,50.2) 23.625,51.106 C612.1@23.675,51.156 ; C607.1@23.675,82.506 23.7,82.506 24.712,81.494 24.712,81.288 v2(24.75,81.25) ; v3(24.225,39) 24.225,39.775 C348.1@24.425,39.975 ; v3(24.65,44.125) 24.775,44.25 C305.1@25.575,44.25 ; v3(26.25,38.4) 26.25,39.15 26.875,39.775 C349.2@27.125,39.775 ; R627.1@27.675,72.5 27.675,73.473 27.7,73.498 v1(27.7,73.525) ; R626.1@29.75,69.225 29.763,69.212 30.488,69.212 v1(30.5,69.2) 30.481,69.219 30.481,69.29 30.475,69.296 30.475,69.961 30.462,69.975 30.462,70.187 C743.1@30.362,70.287 ; C704.1@30.325,61.25 30.425,61.35 30.425,61.898 30.5,61.973 v1(30.5,62) ; C722.1@30.425,45.825 30.481,45.881 30.481,46.531 v1(30.5,46.55) ; C742.1@32.075,69.925 32.07,69.92 32.07,69.257 32.1,69.227 v1(32.1,69.2) ; C710.1@32.1,45.825 v1(32.1,46.55) ; v1(32.1,53.75) 32.113,53.762 32.113,54.462 C723.1@32.125,54.475 ; v1(33.7,46.55) 33.719,46.569 34.494,46.569 R701.1@34.55,46.625 ; v1(33.7,62) 33.713,61.987 33.713,61.337 C703.1@33.725,61.325 ; v1(34.5,53.75) 34.519,53.769 34.519,54.419 C711.1@34.55,54.45 ; C740.1@35.275,48.925 35.275,48.875 35.981,48.169 36.081,48.169 v1(36.1,48.15) ; C702.1@36.1,62.8 v1(36.1,63.6) ; C726.1@36.675,53.8 36.675,53.1 36.875,52.9 C729.1@36.875,52.85 36.888,52.837 36.888,52.162 v1(36.9,52.15) ; C745.1@36.8,69.25 36.881,69.169 36.881,67.619 v1(36.9,67.6) ; C705.1@36.9,61.3 36.95,61.3 37.631,61.981 37.681,61.981 v1(37.7,62) ; C806.1@37.6,73.925 37.825,74.15 X800.2@39.15,74.15 ; C701.1@37.675,62.9 37.688,62.912 37.688,63.587 v1(37.7,63.6) ; C709.1@37.7,45.8 v1(37.7,46.55) ; C718.1@38.481,61.244 38.49,61.253 38.49,61.99 v1(38.5,62) ; C721.1@38.5,45.825 v1(38.5,46.55) ; C725.1@39.25,54.5 39.281,54.469 39.281,53.769 v1(39.3,53.75) ; C731.1@39.25,70.05 39.281,70.019 39.281,69.219 v1(39.3,69.2) ; v1(39.3,52.15) 39.319,52.169 40.744,52.169 C728.1@40.775,52.2 ; v1(40.1,53.75) 40.119,53.769 40.119,54.444 C738.1@40.15,54.475 ; v1(40.1,63.6) 40.119,63.581 40.454,63.581 40.459,63.575 40.725,63.575 C716.1@40.825,63.475 ; v1(40.1,67.6) 40.119,67.619 40.119,68.344 C734.1@40.15,68.375 ; v1(40.1,69.2) 40.119,69.219 40.169,69.219 40.8,69.85 C732.1@40.8,69.9 ; v1(41.698,94.8) 41.717,94.819 42.269,94.819 42.4,94.95 42.425,94.95 42.75,95.275 C512.1@42.75,95.3 ; v1(42.1,61.875) 42.119,61.856 42.119,61.709 42.534,61.294 C717.1@42.534,61.244 ; C739.1@42.4,54.45 42.481,54.369 42.481,53.769 v1(42.5,53.75) ; v1(42.5,46.55) 42.519,46.531 42.519,45.857 C737.1@42.56,45.816 ; v1(42.5,52.15) 42.519,52.169 42.619,52.169 43.225,52.775 C727.1@43.225,52.825 ; v1(42.5,67.6) 42.519,67.581 42.519,66.906 C735.1@42.55,66.875 ; v1(42.5,69.2) C733.1@42.5,69.85 ; v1(43.45,46.725) 43.477,46.725 43.552,46.8 44.125,46.8 C708.1@44.225,46.9 ; v1(43.475,62.4) 43.494,62.381 43.544,62.381 43.975,61.95 C715.1@44.025,61.95 ; v1(43.575,99.677) 43.575,99.075 C511.1@43.825,98.825 ; v3(44.9,7.425) 44.9,6.575 45.05,6.425 45.05,6.35 45.3,6.1 R300.2@45.375,6.1 ; R300.2@45.45,6.1 46.05,6.7 C357.1@47.725,6.7 ; C510.1@45.55,98.525 45.575,98.525 45.9,98.85 45.9,98.875 46.096,99.071 46.096,99.648 46.15,99.702 46.15,99.811 46.414,100.075 46.786,100.075 47.561,99.3 v1(47.952,99.3) ; C509.1@46.725,97.325 46.725,97.3 47.481,96.544 47.756,96.544 v1(47.775,96.525) ; v1(50.15,95.825) v1(50.15,96.325) ; C601.1@52.25,57.175 53.05,57.175 53.15,57.075 C344.1@53.15,57.05 ; v3(52.85,22.975) 52.85,24.275 C1504.1@52.875,24.3 ; v1(52.925,64.4) 53.315,64.4 C343.1@53.681,64.767 ; v1(52.967,56.449) 52.967,56.476 53.05,56.559 53.05,56.95 53.425,57.325 C600.1@53.425,58 ; v1(53.888,50.395) 53.907,50.376 54.625,50.376 C341.1@54.725,50.275 ; C342.1@54.1,53.025 54.33,52.795 v1(54.688,52.795) ; C356.1@56,57.6 56.1,57.7 56.1,58.18 56.288,58.368 v1(56.288,58.395) ; v1(56.3,32.025) 57.025,32.025 57.125,31.925 57.15,31.925 57.475,31.6 C1514.1@57.475,31.575 ; v1(56.3,36.025) 56.65,36.375 C1515.1@57.575,36.375 ; v1(56.688,49.42) 56.707,49.439 56.989,49.439 57.2,49.65 57.25,49.65 57.35,49.75 C337.1@57.35,49.8 ; v3(57.675,26.211) 58.089,26.625 58.325,26.625 59.05,27.35 C1503.1@59.075,27.35 ; v1(57.888,54.395) C309.1@58.639,54.395 ; v1(57.888,61.595) 58.645,61.595 C300.1@58.65,61.6 ; C308.1@57.9,58.4 57.95,58.4 58.668,59.118 58.668,59.176 v1(58.688,59.195) ; C355.1@58.25,65.6 58.25,65.641 58.35,65.741 59.068,65.741 v1(59.088,65.76) ; C309.1@58.688,54.443 58.688,54.4 58.75,54.338 59.124,54.338 59.3,54.162 ; C320.1@59.4,53.7 59.3,53.8 59.3,54.162 ; C310.1@59.425,64.775 59.425,64.084 59.488,64.022 v1(59.488,63.995) ; v1(59.488,54.395) 59.488,54.368 59.3,54.18 59.3,54.162 ; v1(59.488,55.995) v1(60.288,55.995) v1(61.888,55.995) ; v1(59.488,58.395) 59.507,58.376 59.507,57.693 C333.1@59.6,57.6 ; v5(59.675,8.222) 59.713,8.183 59.713,7.762 59.775,7.7 59.775,7.675 60.1,7.35 C1511.1@60.125,7.35 ; C301.1@59.85,80.4 59.85,80.425 60.349,80.924 60.349,81.236 v3(60.407,81.293) ; v1(60.288,51.195) 61,50.482 61,50.4 61.04,50.36 C338.1@61.122,50.36 ; v1(60.288,55.195) 60.307,55.214 60.414,55.214 61.05,55.85 C318.1@61.1,55.85 ; v1(60.288,58.395) v1(60.288,59.195) ; v1(60.288,60.795) v1(59.488,59.995) v1(60.288,59.195) ; v1(60.288,62.395) 60.307,62.376 60.374,62.376 60.55,62.2 C306.1@61.1,62.2 ; v1(61.088,64.795) 61.107,64.814 61.107,65.057 61.5,65.45 C313.1@61.5,65.5 ; C317.1@61.1,58.5 61.205,58.395 v1(61.888,58.395) ; C319.1@61.1,59.45 60.543,59.45 v1(60.288,59.195) ; C321.1@61.9,53.7 61.894,53.706 61.894,54.389 v1(61.888,54.395) v1(62.688,55.195) v1(61.888,55.995) ; v1(62.4,25.925) 62.4,27.425 C1505.1@62.5,27.525 ; C347.1@62.65,57.6 62.669,57.581 62.669,56.814 v1(62.688,56.795) v1(61.888,55.995) ; C327.1@63.45,60.7 63.469,60.681 63.469,60.014 v1(63.488,59.995) ; v1(63.488,52.795) 63.507,52.776 63.507,52.63 C329.1@64.218,51.918 ; v1(63.488,55.995) 63.507,56.014 64.164,56.014 C307.1@64.2,56.05 ; v1(64.261,99.974) 64.261,101.011 C1201.1@64.475,101.225 ; v1(65.225,28.3) 65.252,28.3 65.302,28.35 C1513.1@66.525,28.35 ; v1(67.488,56.795) 67.507,56.814 67.636,56.814 68.04,57.218 C354.1@68.182,57.218 ; v1(67.488,64.795) 67.507,64.814 67.507,65.067 C326.1@68.17,65.73 ; v1(68.288,51.195) 68.307,51.214 68.336,51.214 68.74,51.618 C340.1@68.882,51.618 ; v1(68.288,59.995) 68.307,59.976 68.524,59.976 68.85,59.65 C353.1@68.9,59.65 ; v1(68.288,62.395) 68.288,62.368 68.718,61.937 C328.1@68.718,61.818 ; C339.1@69,53.1 68.965,53.135 68.965,53.277 69.243,53.556 69.243,53.976 v1(69.263,53.995) ; C1008.1@70.025,100.875 v3(70.025,102.025) ; v3(71.475,102.025) 71.475,101.944 71.578,101.84 X1000.2@71.578,100.925 ; C1500.1@74.875,17.5 v1(76.1,17.5) ; C1501.1@74.875,19.15 75.998,19.15 76.073,19.075 v1(76.1,19.075) ; C1502.1@74.875,20.8 v1(76.1,20.8) ; v3(78.3,22.175) 78.3,22.256 78.575,22.531 78.575,23.175 C1520.1@78.9,23.5 ; C1002.1@80.375,99.85 81.175,99.85 v1(81.6,100.275) ; C1004.1@80.4,97.525 80.425,97.525 80.75,97.85 80.75,98.437 80.826,98.514 v1(80.826,98.541) ; v1(81.875,101.275) 81.888,101.287 81.888,102.237 C1001.1@81.9,102.25 ; C1000.1@83.175,102.325 83.376,102.124 v1(83.376,100.999) ; v1(83.326,98.499) 83.345,98.518 83.345,99.145 83.55,99.35 83.55,99.375 83.875,99.7 C1003.1@83.9,99.7 ; C1102.1@101.8,83.875 102.575,83.875 v5(103.05,84.35) 103.05,85 C1109.1@103.375,85.325 ; C1116.1@102.25,80.975 102.25,81.1 v5(103.05,81.9) ; v5(104.4,81.9) 104.525,81.775 C1113.1@104.525,80.65 ; v5(104.4,84.35) 104.4,84.404 104.575,84.579 104.575,85.025 C1107.1@104.9,85.35 ; v5(105.75,81.9) 105.804,81.9 105.916,81.788 107.388,81.788 C1100.1@107.405,81.805 ; v5(105.75,83.125) 106.325,83.125 C1108.1@106.85,83.65 ; v5(105.75,84.35) 105.75,84.625 C1104.1@106.6,85.475 ; R1117.2@112.625,83.975 112.656,83.944 112.656,83.219 v1(112.675,83.2) ; v1(114.25,83.3) 114.269,83.319 114.269,83.994 X1100.2@114.3,84.025 ; J1701.79@115.6,39 v2(117.325,39) ; J1701.73@115.6,41.4 v2(117.325,41.4) ; J1701.67@115.6,43.8 v2(117.325,43.8) ; J1701.55@115.6,48.6 v2(117.325,48.6) ; J1701.49@115.6,51 v2(117.325,51) ; J1701.43@115.6,53.4 v2(117.325,53.4) ; J1701.25@115.6,60.6 v2(117.325,60.6) ; J1701.19@115.6,63 v2(117.325,63) ; J1701.13@115.6,65.4 v2(117.325,65.4) ; J1701.1@115.6,70.2 v2(117.325,70.2) ; v3(118,82.875) C1117.1@118,83.975 ; v2@118.25,46.175 J1701.62@119.975,46.175 ; v2@118.256,58.205 J1701.32@119.981,58.205 ; v2(118.275,39) J1701.80@120,39 ; v2(118.275,41.4) J1701.74@120,41.4 ; v2(118.275,43.8) J1701.68@120,43.8 ; v2(118.275,48.6) J1701.56@120,48.6 ; v2(118.275,51) J1701.50@120,51 ; v2(118.275,53.4) J1701.44@120,53.4 ; v2(118.275,55.8) J1701.38@120,55.8 ; v2(118.275,60.6) J1701.26@120,60.6 ; v2(118.275,63) J1701.20@120,63 ; v2(118.275,65.4) J1701.14@120,65.4 ; v2(118.275,67.8) J1701.8@120,67.8 ; v2(118.275,70.2) J1701.2@120,70.2
  S10 (SIG) w1: v3(5.1,80.025) 5.125,80.05 C741.1@6.175,80.05 ; v3(5.125,78.475) 5.15,78.5 C714.1@6.175,78.5 ; v3(12.85,72.75) 13.95,72.75 14.225,72.475 C346.2@14.225,72.05 ; J501.5@31.575,108.85 31.766,108.659 31.766,107.034 C516.1@32.2,106.6 ; C336.1@42.793,10.077 42.793,8.982 v3(42.825,8.95) ; v3(44.6,90.5) 44.6,89.332 C315.2@44.633,89.3 ; C335.1@44.769,10.202 44.769,8.981 v3(44.775,8.975) ; C314.1@47.725,88.05 47.725,88.875 v3(47.775,88.925) ; v3(48.075,8.75) 48.075,9.707 C334.1@48.218,9.85 ; v3(48.558,31.951) 48.558,34.033 C303.2@48.975,34.45 49.475,33.95 v2(49.475,31.95) ; 49.585,75.323 C803.2@50.669,75.323 50.669,77.768 v5(50.048,78.389) ; C316.1@54.475,88.475 54.875,88.475 55.15,88.75 v3(55.15,89.85) ; v3(62.248,107.322) 62.877,106.693 D1202.1@63.329,106.693 D1201.1@64.147,106.693 D1200.1@64.981,106.693 ; C324.1@89.206,92.625 89.275,92.694 v3(89.275,94) ; C325.1@91.95,92 91.95,92.875 v3(91.975,92.9) ; C312.2@94.575,40.2 95.125,40.2 95.4,39.925 v3(95.4,37.775) ; v3(97.025,40.675) 97.225,40.875 C311.1@97.225,41.625 ; v3(104.025,12.2) 104.139,12.314 C352.1@104.139,13.025 ; v3(106.45,12.15) 106.45,13.018 C351.1@106.457,13.025 ; v3(109.575,11.075) 109.575,12.325 C350.1@109.625,12.375
  other v1: 96.525,12.875 97.144,12.875 97.762,12.875 98.381,12.875 99,12.875 81.375,13.7 80.825,13.725 85.1,20.225 85.65,20.225 81.525,21.425 82.325,21.425 86.525,21.45 85.95,21.475 67.875,26.35 65.375,26.425 72.9,27.75 72.85,29.85 52.75,33.75 72.9,35.725 68.475,36.75 72.875,36.775 52.75,37.2 72.88,37.772 64.15,37.825 66.15,38.05 67.725,38.15 66.15,41.425 64.35,41.45 67.95,41.45 63.1,42.5 68.211,46.325 67.025,47.25 69.35,47.4 70.4,47.425 71.05,48.925 71.925,49.7 72.7,50.5 73.375,51.275 74.05,51.9 74.7,52.525 75.525,53.275 76.325,53.8 77.1,54.275 77.775,54.775 49.75,55.425 48.575,55.625 48.538,60.025 49.863,60.025 65.888,60.795 74.45,63.65 74.75,65.7 61.15,69.4 63.15,70.125 71.9,72.95 75.725,73.125 99.756,73.44 98.26,73.508 103.85,73.5 102.05,73.525 105.625,73.525 107.275,73.6 77.125,74.2 77.175,75.775 46.003,78.047 74.675,88.65 75.275,88.65 52.6,91.45 53.225,91.45 53.8,92.075 53.8,92.6 42.65,97 61.875,97.65 63.068,97.65 64.261,97.65 42.65,97.7 52.325,97.775 52.875,97.775 51.05,97.8 51.6,97.8 61.875,98.812 63.068,98.812 81.601,99.266 82.601,99.274 51.625,99.55 52.325,99.55 61.875,99.974 63.068,99.974 82.601,100.274 50.609,101.049 51.223,101.049 80.875,101.05 39.65,103.3 45.95,103.725 39.65,103.9 53.8,104.15 54.484,104.154 52.825,104.4 39.625,104.475 52.8,105.025 39.625,105.1 43.15,105.175 20.725,106 22.1,106 23.325,106 24.7,106 25.8,106 27.175,106 28.375,106 29.75,106
  other v2: 20.175,20.675 21.75,20.675 20.175,21.625 21.75,21.625 21.875,33.55 22.875,33.55 21.875,34.35 22.875,34.35 21.875,47.595 22.875,47.595 22.875,48.395 20.225,77.551 20.225,78.351 22.875,90.85 21.875,91.65 22.875,91.65 66.325,96.65 66.325,97.3
  other v3: 18.275,22.65 17.3,22.675 16.575,23.8 16.575,24.575 36.575,73.6 36.575,74.4 113.867,77.519 112.475,77.725 101.666,87.303 101.666,88.134 76.4,105.975 77.1,105.975 78,105.975 78.7,105.975
  other v5: 61.75,4.975 62.55,4.975 63.35,4.975 64.15,4.975 64.95,4.975 65.75,4.975 66.55,4.975 67.35,4.975 68.15,4.975 59.425,23.525 60.9,23.525 62.25,23.55 63.1,23.55 64.375,23.575 47.826,78.389 47.826,79.963 50.048,79.963 47.826,81.537 50.048,81.537 103.05,83.125 104.4,83.125
HDMI_CEC: D1500.C D1501.2 J1500.13 U1500.48 | length 19.5
  S1 (SIG) w0.11: J1500.13@61.675,9.513 61.675,11.475 D1501.2@61.75,11.55 ; U1500.48@67.9,24.8 v5(67.9,22.95) 67.96,22.95 68.21,22.7 68.6,22.7 D1500.C@68.625,22.675
  S6 (SIG) w0.1: v5(61.675,10.825) 61.675,16.875 64.674,19.874 64.824,19.874 v5(67.9,22.95)
HDMI_CEC_CLK: R1510.1 U1500.50 | length 6.2
  S1 (SIG) w0.11: U1500.50@68.9,24.8 68.9,24.214 69.35,23.764 v1(69.35,23.7)
  S10 (SIG) w0.11: v1(69.35,23.7) 71.85,23.7 73.085,24.935 R1510.1@73.75,24.935
HDMI_CLK: U300.N17 U1500.79 | length 30.3
  S1 (SIG) w0.11: U300.N17@66.288,55.595 v1(66.688,55.195) ; U1500.79@67.4,40.25 67.4,41.713 67.65,41.963 v5(67.65,42.05)
  S8 (SIG) w0.1: v1(66.688,55.195) 71.455,55.195 71.76,54.89 71.81,54.84 71.811,54.839 ccw(c71.896,54.925) 71.896,54.804 72.67,54.804 cw(c72.67,54.734) 72.741,54.734 72.741,54.521 cw(c72.67,54.521) 72.67,54.45 71.449,54.45 ccw(c71.449,54.38) 71.378,54.38 71.378,54.167 ccw(c71.449,54.167) 71.449,54.096 72.67,54.096 cw(c72.67,54.026) 72.741,54.026 72.741,53.813 cw(c72.67,53.813) 72.67,53.742 71.449,53.742 ccw(c71.449,53.672) 71.378,53.672 71.378,53.459 ccw(c71.449,53.459) 71.449,53.388 72.67,53.388 cw(c72.67,53.318) 72.741,53.318 72.741,53.105 cw(c72.67,53.105) 72.67,53.034 71.462,53.034 ccw(c71.462,52.964) 71.391,52.964 71.391,52.751 ccw(c71.462,52.751) 71.462,52.68 71.975,52.68 cw(c71.975,52.58) 72.075,52.58 72.075,52.075 72.075,52.05 68.625,48.6 68.625,43.025 v5(67.65,42.05)
HDMI_COUT: R1510.2 X1500.3 | length 1.9
  S10 (SIG) w0.11: R1510.2@73.75,23.635 74.075,23.31 X1500.3@75.55,23.31
HDMI_D0: U300.V16 U1500.88 | length 29.6
  S1 (SIG) w0.11: v5(62.65,42.05) 62.65,41.963 62.9,41.713 U1500.88@62.9,40.25 ; U300.V16@65.488,51.595 v1(65.888,51.195)
  S8 (SIG) w0.1: v5(62.65,42.05) 62.175,42.525 62.175,42.812 62.175,42.862 62.104,42.932 60.43,42.932 60.36,43.003 60.36,43.216 60.43,43.286 62.467,43.286 62.538,43.357 62.538,43.57 62.467,43.64 60.948,43.64 60.877,43.711 60.877,43.924 60.948,43.994 62.467,43.994 62.538,44.065 62.538,44.278 62.467,44.348 61.571,44.348 61.5,44.419 61.5,44.632 61.571,44.702 62.467,44.702 62.538,44.773 62.538,44.986 62.467,45.056 61.571,45.056 61.5,45.127 61.5,45.34 61.571,45.41 62.467,45.41 62.538,45.481 62.538,45.694 62.467,45.764 61.571,45.764 61.5,45.835 61.5,46.048 61.571,46.118 62.467,46.118 62.538,46.189 62.538,46.402 62.467,46.472 61.571,46.472 61.5,46.543 61.5,46.756 61.571,46.826 62.467,46.826 62.538,46.897 62.538,47.11 62.467,47.18 61.571,47.18 61.5,47.251 61.5,47.464 61.571,47.534 62.176,47.534 62.447,47.805 65.837,51.195 v1(65.888,51.195)
HDMI_D1: U300.V17 U1500.87 | length 29.2
  S1 (SIG) w0.11: U1500.87@63.4,40.25 63.4,41.713 63.65,41.963 v5(63.65,42.05)
  S1 (SIG) w0.3: U300.V17@66.288,51.595 v1(66.688,51.195)
  S8 (SIG) w0.1: v5(63.65,42.05) 63.555,42.05 63.391,42.214 63.309,42.214 63.062,41.967 63.062,41.896 62.816,41.65 62.484,41.65 62.138,41.996 62.138,42.279 61.792,42.625 59.65,42.625 59.55,42.525 59.55,41.959 59.609,41.9 61.85,41.9 62.332,41.418 63.823,41.418 64.1,41.695 64.1,42.225 63.221,43.104 62.936,43.389 62.936,43.489 63.007,43.56 63.157,43.56 63.228,43.631 63.228,43.843 63.157,43.914 62.809,43.914 62.738,43.985 62.738,44.197 62.809,44.268 63.157,44.268 63.228,44.339 63.228,44.551 63.157,44.622 62.809,44.622 62.738,44.693 62.738,44.905 62.809,44.976 63.157,44.976 63.228,45.047 63.228,45.259 63.157,45.33 62.809,45.33 62.738,45.401 62.738,45.613 62.809,45.684 63.158,45.684 63.228,45.755 63.228,45.967 63.158,46.038 62.809,46.038 62.738,46.109 62.738,46.321 62.809,46.392 63.158,46.392 63.228,46.463 63.228,46.675 63.158,46.746 62.809,46.746 62.738,46.817 62.738,47.029 62.809,47.1 63.158,47.1 63.228,47.171 63.228,47.383 63.158,47.454 62.951,47.454 62.88,47.525 62.88,47.625 62.93,47.675 66.393,51.137 66.63,51.137 v1(66.688,51.195)
HDMI_D2: U300.W16 U1500.86 | length 30.7
  S1 (SIG) w0.11: v5(63.65,38.45) 63.65,38.537 63.9,38.787 U1500.86@63.9,40.25 ; v1(64.9,47.148) 65.327,47.575 65.516,47.575 65.888,47.947 65.888,50.395 U300.W16@65.488,50.795
  S8 (SIG) w0.1: v5(63.65,38.45) 63.65,38.95 63.65,39 63.579,39.071 60.351,39.071 60.28,39.142 60.28,39.354 60.351,39.425 64.273,39.425 64.344,39.496 64.344,39.708 64.273,39.779 60.351,39.779 60.28,39.85 60.28,40.062 60.351,40.133 64.177,40.133 64.248,40.204 64.248,40.416 64.177,40.487 64.124,40.487 64.053,40.558 64.053,40.658 64.268,40.873 65.05,41.655 65.05,42.216 64.85,42.416 64.85,47.098 v1(64.9,47.148)
HDMI_D3: U300.V18 U1500.85 | length 29.7
  S1 (SIG) w0.11: U1500.85@64.4,40.25 64.4,38.787 64.65,38.537 v5(64.65,38.45) ; U300.V18@67.088,51.595 v1(67.488,51.195)
  S8 (SIG) w0.1: v5(64.65,38.45) 64.65,37.225 64.325,36.9 62.209,36.9 62.15,36.959 62.15,37.191 62.209,37.25 63.666,37.25 63.725,37.309 63.725,37.491 63.666,37.55 61.959,37.55 61.9,37.609 61.9,37.841 61.959,37.9 63.666,37.9 65.25,39.484 65.25,48.225 65.591,48.566 65.877,48.852 65.977,48.852 66.186,48.644 66.286,48.644 66.436,48.794 66.436,48.894 66.228,49.102 66.228,49.203 66.378,49.353 66.478,49.353 66.686,49.144 66.787,49.144 66.937,49.295 66.937,49.395 66.649,49.682 66.649,49.782 66.799,49.932 66.899,49.932 67.187,49.645 67.287,49.645 67.437,49.795 67.437,49.895 67.088,50.245 67.088,50.345 67.238,50.495 67.417,50.495 67.488,50.566 67.488,51.161 v1(67.488,51.195)